# Altium PCB ver_5.PcbDoc
Units mil, origin at the board's own origin, x right, y up, seen from the top; angles counter-clockwise.
Board outline 2874.65 x 4650.67 mil, 2 copper layers (Top Layer, Bottom Layer); 64 components, 49 nets, 262 pads, 15 vias.
Unrouted connection lines stored in the file: 131.
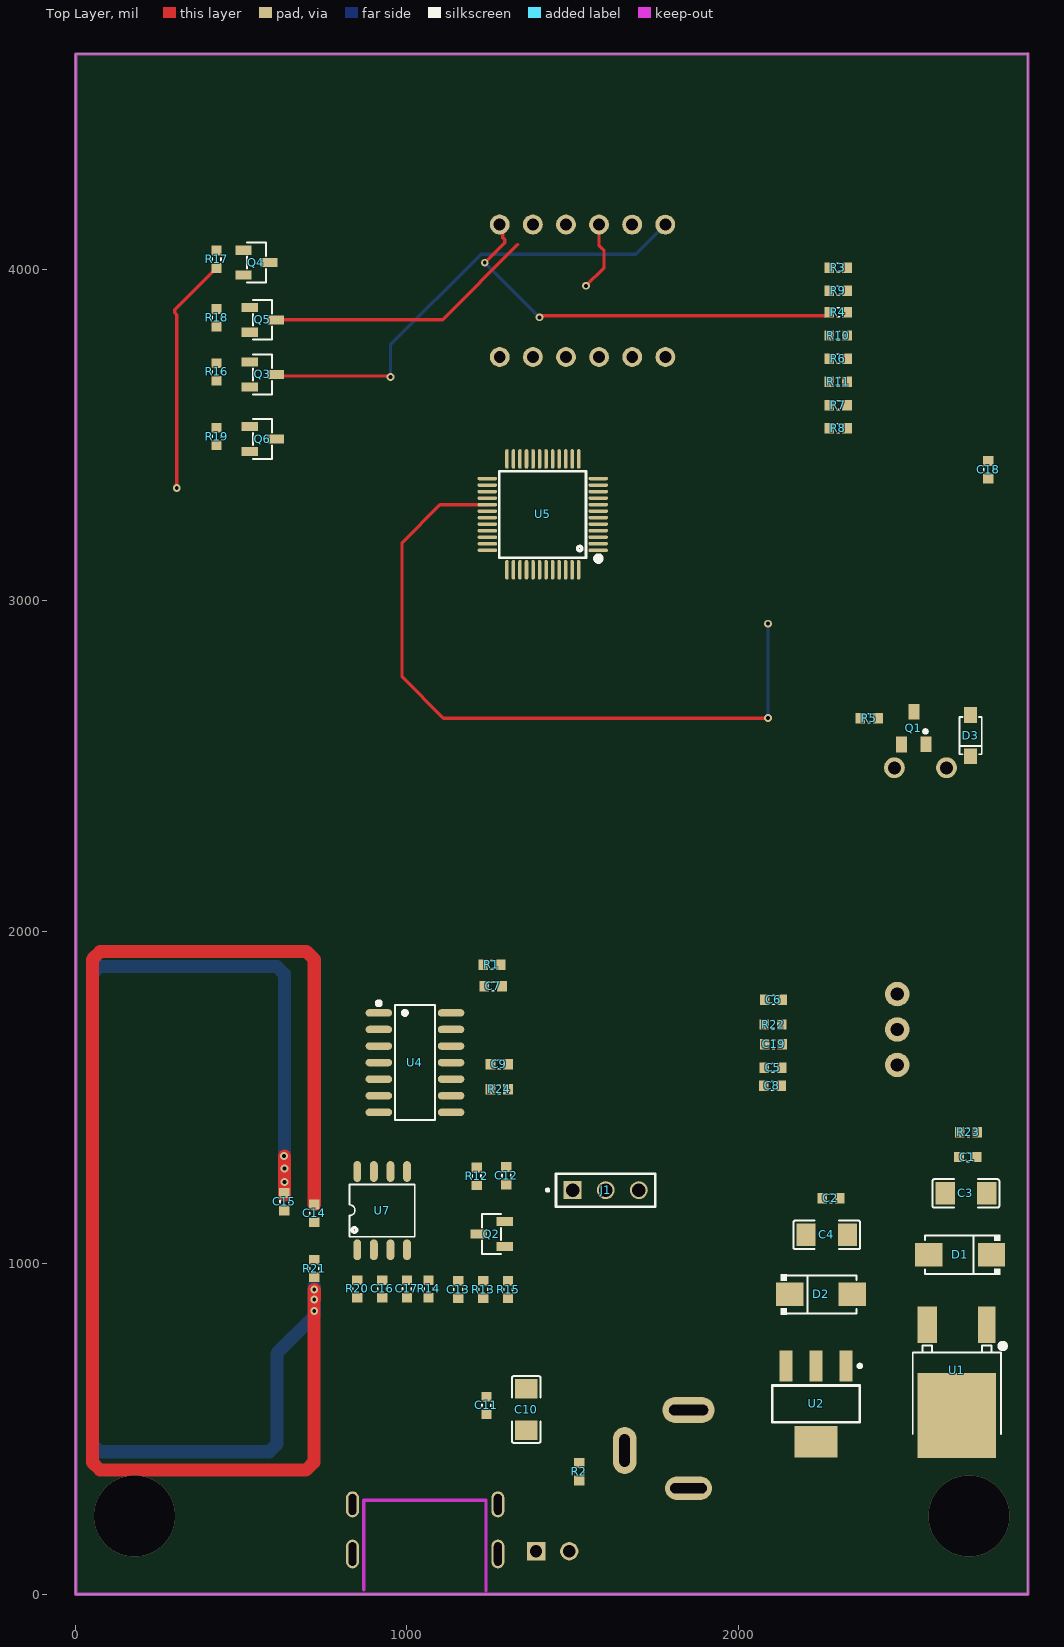
[diagram p0: Top Layer view]
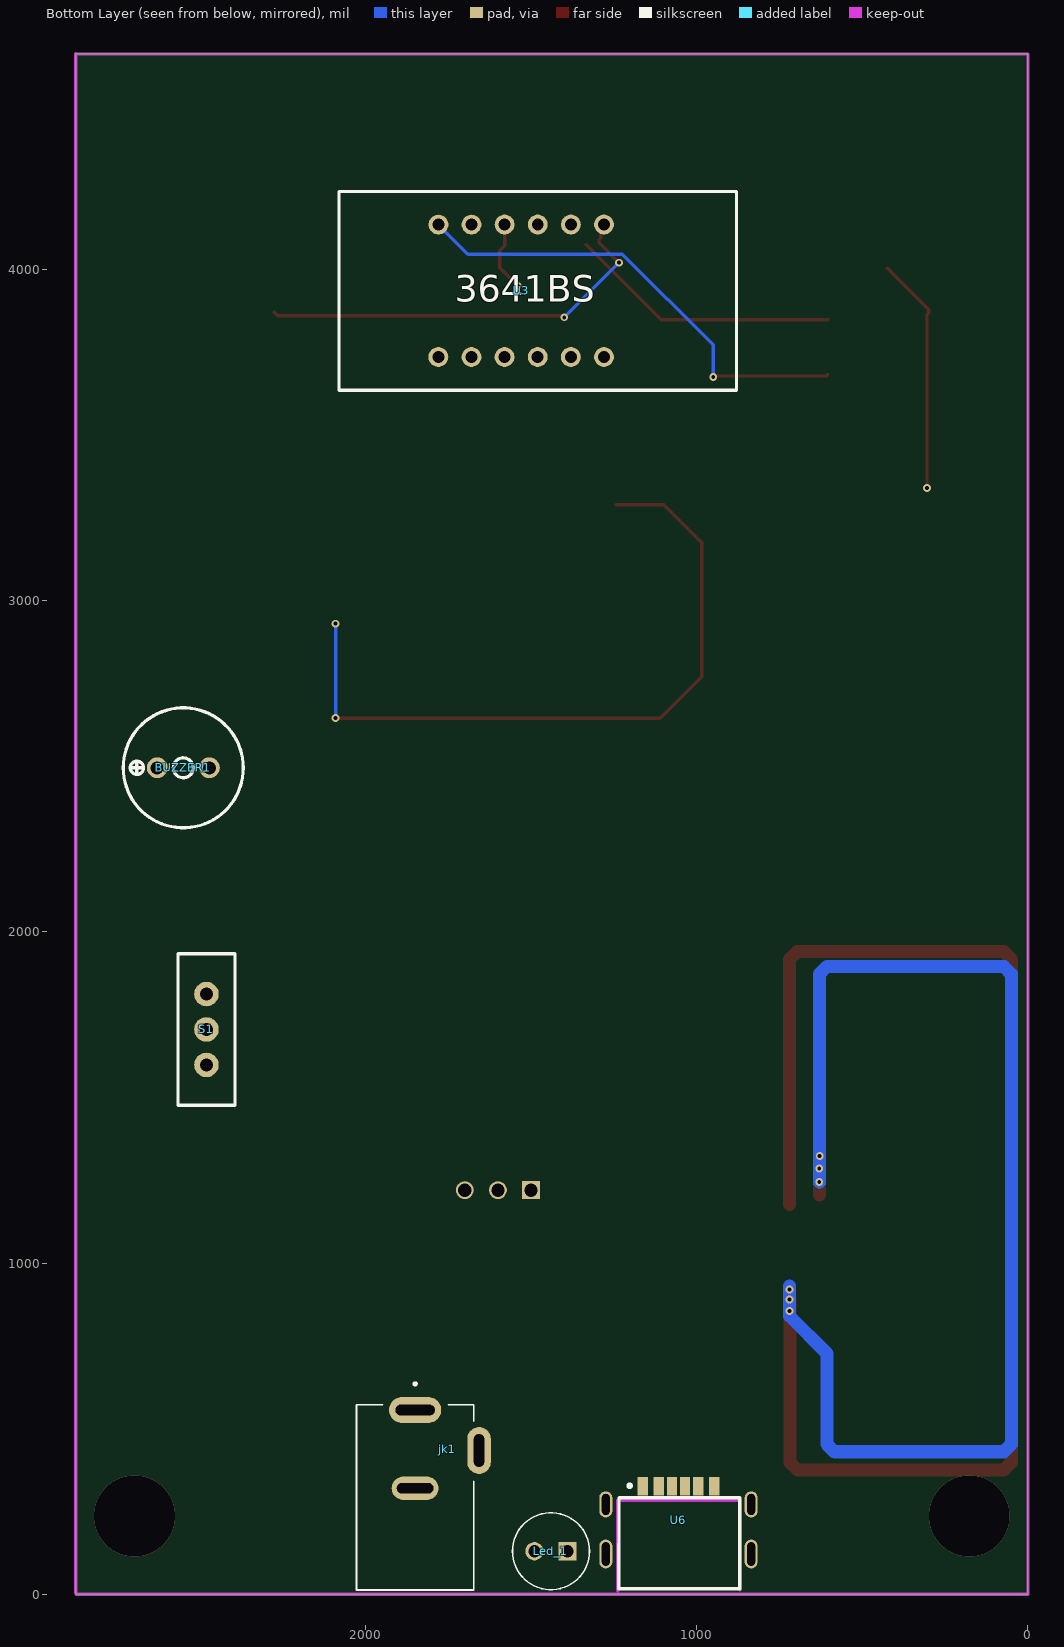
[diagram p1: Bottom Layer view, seen from below]

## Layer stack, top to bottom
Top Solder: solder mask 0.4, Solder Resist, Dk 3.5
Top Layer: signal copper 1.4
Dielectric 1: dielectric 12.6, FR-4, Dk 4.8
Bottom Layer: signal copper 1.4
Bottom Solder: solder mask 0.4, Solder Resist, Dk 3.5

## Board outline
0,0 2874.02,0 2874.65,5 2874.65,4650.67 2874.02,4649.96 0,4650

## Design rules (kind name [scope] priority, off if disabled: settings)
Clearance [All] p1: gap=9 ignorepadtopadclearanceinfootprint=FALSE
PolygonConnect [All] p1: connectstyle=Relief reliefconductorwidth=10 reliefentries=4 polygonreliefangle="90 Angle" airgapwidth=10
RoutingVias [All] p1: holewidth=10 width=20 viastyle="Through Hole" minholewidth=5 minwidth=10 maxholewidth=20 maxwidth=30
SolderMaskExpansion [All] p1: expansion=4 istentingtop=FALSE
Width [All] p1: maxlimit=10 minlimit=10 preferedwidth=10
30 further rules are at their usual default settings.

## Classes and differential pairs
component class ver_3: C3 C5 C6 C7 C8 C9 D2 J1 Led_1 Q Q1 Q2 Q3 Q5 Q6 R1 R2 R5 R12 R13 R14 R15 R16 R17 R18 R19 R20 R21 R22 U1 U2 U4 U7

## Components (designator, comment, footprint, x,y, rotation, side; value= is the part's Value field where it differs from the comment)
BUZZER1 "buzzer_9x5.5" buzzer_9x5.5 2550,2495 r90 bottom
C1 "0.1uF" CN-SMD-0603 2693.43,1320 r0 top
C2 "0.1uF" CN-SMD-0603 2280,1195 r0 top
C3 "22uF" cap_1206 2687.3,1210 r0 top
C4 "22uF" cap_1206 2267.3,1085 r0 top
C5 "104" CN-SMD-0603 2105,1590 r0 top
C6 "104" CN-SMD-0603 2106.57,1795 r0 top
C7 "104" CN-SMD-0603 1260,1835 r0 top
C8 "104" CN-SMD-0603 2103.43,1535 r0 top
C9 "104" CN-SMD-0603 1278.43,1600 r0 top
C10 "22uF" cap_1206 1360,557.7 r90 top
C11 "0.1uF" CN-SMD-0603 1240,570 r90 top
C12 "104" CN-SMD-0603 1300,1263.42 r270 top
C13 "150pF" CN-SMD-0603 1155,920 r270 top
C14 "100pF" CN-SMD-0603 720,1149.76 r90 top
C15 "1nF" CN-SMD-0603 630,1185 r90 top
C16 "104" CN-SMD-0603 925,921.57 r270 top
C17 "104" CN-SMD-0603 1000,921.57 r270 top
C18 "1nF" CN-SMD-0603 2755,3395 r270 top
C19 "104" CN-SMD-0603 2106.57,1660 r0 top
D1 "diode_1N4007(M7)" diode_1N4007-M7 2670,1025 r180 top
D2 "diode_1N4007(M7)" diode_1N4007-M7 2250,905 r0 top
D3 "1N4148" SOD-123 2700,2590 r270 top value=1N4007
J1 "JP3x1" JP3x1 1425,1220 r0 top
jk1 "jack dc" "jack dc" 1850,556.22 r270 bottom
Led_1 "led_5mm" led_5mm 1440,130 r0 bottom
Q1 "AO3400" SOT23B 2530,2615 r0 top value=C1815
Q2 "J3Y" j3y -15696.99,17684.6 r0 top
Q3 "2TY" 2TY 17516.99,-12914.6 r180 top
Q4 "2TY" 2TY 17498.25,-12577 r180 top
Q5 "2TY" 2TY 17516.99,-12749.6 r180 top
Q6 "2TY" 2TY 17516.99,-13109.6 r180 top
R1 "10K" RES-SMD-0603 1256.57,1900 r0 top value="R1/4W - 1K"
R2 "1K" RES-SMD-0603 1520,370 r90 top value="R1/4W - 1K"
R3 "330" RES-SMD-0603 2301.57,4005 r180 top value="R1/4W - 1K"
R4 "330" RES-SMD-0603 2301.57,3870 r180 top value="R1/4W - 1K"
R5 "1K" RES-SMD-0603 2395,2645 r0 top value="R1/4W - 1K"
R6 "330" RES-SMD-0603 2301.57,3730 r180 top value="R1/4W - 1K"
R7 "330" RES-SMD-0603 2301.57,3590 r180 top value="R1/4W - 1K"
R8 "330" RES-SMD-0603 2301.57,3520 r180 top value="R1/4W - 1K"
R9 "330" RES-SMD-0603 2301.57,3935 r180 top value="R1/4W - 1K"
R10 "330" RES-SMD-0603 2301.57,3800 r180 top value="R1/4W - 1K"
R11 "330" RES-SMD-0603 2301.57,3660 r180 top value="R1/4W - 1K"
R12 "2.2K" RES-SMD-0603 1210,1261.57 r270 top value="R1/4W - 1K"
R13 "6.8K" RES-SMD-0603 1230,920 r90 top value="R1/4W - 1K"
R14 "1K" RES-SMD-0603 1065,921.57 r270 top value="R1/4W - 1K"
R15 "2.2K" RES-SMD-0603 1305,920 r270 top value="R1/4W - 1K"
R16 "330" RES-SMD-0603 425,3690 r270 top value="R1/4W - 1K"
R17 "330" RES-SMD-0603 425,4030 r270 top value="R1/4W - 1K"
R18 "330" RES-SMD-0603 425,3853.43 r270 top value="R1/4W - 1K"
R19 "330" RES-SMD-0603 425,3495 r270 top value="R1/4W - 1K"
R20 "47K" RES-SMD-0603 850,921.57 r90 top value="R1/4W - 1K"
R21 "1K5" RES-SMD-0603 720,983.43 r90 top value="R1/4W - 1K"
R22 "4.7K" RES-SMD-0603 2105,1720 r0 top value="R1/4W - 1K"
R23 "1K" RES-SMD-0603 2695,1395 r0 top value="R1/4W - 1K"
R24 "47K" RES-SMD-0603 1278.42,1525 r0 top value="R1/4W - 1K"
S1 "nut_gat_3P" nut_gat_3p 2480,1705 r0 bottom
U1 "78M05" 78M05 2665,640 r270 top
U2 "AMS1117" AMS1117-SOT223 2235,575 r270 top
U3 "3641AS" 3641BS 1480,3935 r180 bottom
U4 "SN74HC14DRG4" 74HC14 1024.02,1609.37 r270 top
U5 "STM32F103C8T6" LQFP-48_L7.0-W7.0-P0.50-LS9.0-BL 1410,3260 r90 top
U6 "USB-TYPE-C-6-PIN-CONG" USB-TYPE-C-6-PIN-CONG 1055,180 r180 bottom
U7 "MC12079" MC12079 925,1158.11 r0 top

## Footprints (in the part's own frame and the unit in brackets; to place one, negate y for a bottom-side part, rotate by r counter-clockwise, add the part's x,y. Pads: shape width x height; smd on the part's side, far side on the other; paste and mask are expansions set on the pad)
2TY [mm]
  rect 1.25x0.7 smd paste+0 mask+0.051: 1(431.596,-422.514) 2(431.596,-420.614) 3(429.597,-421.564)
  silkscreen extent 429.87,-423.09 431.32,-420.04
74HC14 [mil]
  oval 22.6x80.24 smd paste+0 mask+2: 1(-145.63,-109.02) 2(-95.63,-109.02) 3(-45.63,-109.02) 4(4.37,-109.02) 5(54.37,-109.02) 6(104.37,-109.02) 7(154.37,-109.02) 8(154.37,109.02) 9(104.37,109.02) 10(54.37,109.02) 11(4.37,109.02) 12(-45.63,109.02) 13(-95.63,109.02) 14(-145.63,109.02)
  silkscreen extent -181,-115 178,60
78M05 [mm]
  rect 2.8x1.35 smd paste+0 mask+0.051: 1(-4.4,2.174)
  rect 2.8x1.5 smd paste+0 mask+0.051: 3(-4.4,-2.406)
  rect 6.5x6 smd paste+0 mask+0.051: 4(2.55,-0.134)
  silkscreen extent -2.98,-3.51 3.98,3.59
3641BS [mil]
  round 60 hole 36 paste+0 mask+2: 1(-300,-200) 2(-200,-200) 3(-100,-200) 4(0,-200) 5(100,-200) 6(200,-200) 7(200.1,199.9) 8(100.1,199.9) 9(0.1,199.9) 10(-99.9,199.9) 11(-199.8,199.8) 12(-299.8,199.8)
  silkscreen extent -600,-300 600,300
AMS1117-SOT223 [mm]
  rect 2.4x1 smd: 1(-2.9,2.3) 2(-2.9,0) 3(-2.9,-2.3)
  rect 2.4x3.3 smd: 2(2.9,0)
  silkscreen extent -3.02,-3.35 1.4,3.48, body extent -3.39,-3.27 3.5,3.23, height 1.72
buzzer_9x5.5 [mm]
  round 1.6 hole 1 paste+0 mask+0.051: 1(0,1.999) 2(0,-1.999)
  silkscreen extent -4.6,-4.6 4.6,4.6
cap_1206 [mm]
  rect 1.485x1.728 smd paste-100 mask+0.051: 1(-1.593,0) 2(1.593,0)
  silkscreen extent -2.56,-1.09 2.56,1.09
CN-SMD-0603 [mm]
  round 0.254 on Mech15: 0(0,0)
  rect 0.75x0.8 smd: 1(-0.675,0) 2(0.675,0)
  silkscreen extent -0.1,-0.34 0.1,0.34, body extent -0.8,-0.43 0.8,0.43, height 0.8
diode_1N4007-M7 [mm]
  rect 2.1x1.8 smd paste+0 mask+0.051: 1(-2.4,0) 2(2.4,0)
  silkscreen extent -3.08,-1.54 2.7,1.54
j3y [mm]
  rect 1.25x0.7 smd paste+0 mask+0.051: 1(431.596,-422.514) 2(431.596,-420.614) 3(429.597,-421.564)
  silkscreen extent 429.87,-423.09 431.32,-420.04
"jack dc" [mm]
  oval 2x4 hole 0.8 slot 3 at 90 deg: 1(0,0)
  oval 1.8x3.6 hole 0.8 slot 2.8 at 90 deg: 2(6,0)
  oval 3.6x1.8 hole 0.8 slot 2.5 at 0 deg: 3(3.1,4.9)
  silkscreen extent -2.1,-4.5 13.8,4.5
JP3x1 [mm]
  rect 1.37x1.37 hole 1.02: 01(1.905,0)
  round 1.37 hole 1.02: 02(4.445,0) 03(6.985,0)
  silkscreen extent -0.11,-1.27 8.25,1.27
led_5mm [mm]
  round 1.4 hole 0.93: A(1.27,0)
  rect 1.4x1.4 / inner round 1.4 / far side rect 1.4x1.4 hole 0.93: C(-1.27,0)
  silkscreen extent -2.95,-2.95 2.95,2.95, body extent -2.5,-2.95 2.95,2.95, height 9.6
LQFP-48_L7.0-W7.0-P0.50-LS9.0-BL [mm]
  oval 0.27x1.5 smd paste+0 mask+0.05: 1(-2.75,-4.25) 2(-2.25,-4.25) 3(-1.75,-4.25) 4(-1.25,-4.25) 5(-0.75,-4.25) 6(-0.25,-4.25) 7(0.25,-4.25) 8(0.75,-4.25) 9(1.25,-4.25) 10(1.75,-4.25) 11(2.25,-4.25) 12(2.75,-4.25) 25(2.75,4.25) 26(2.25,4.25) 27(1.75,4.25) 28(1.25,4.25) 29(0.75,4.25) 30(0.25,4.25) 31(-0.25,4.25) 32(-0.75,4.25) 33(-1.25,4.25) 34(-1.75,4.25) 35(-2.25,4.25) 36(-2.75,4.25)
  oval 1.5x0.27 smd paste+0 mask+0.05: 13(4.25,-2.75) 14(4.25,-2.25) 15(4.25,-1.75) 16(4.25,-1.25) 17(4.25,-0.75) 18(4.25,-0.25) 19(4.25,0.25) 20(4.25,0.75) 21(4.25,1.25) 22(4.25,1.75) 23(4.25,2.25) 24(4.25,2.75) 37(-4.25,2.75) 38(-4.25,2.25) 39(-4.25,1.75) 40(-4.25,1.25) 41(-4.25,0.75) 42(-4.25,0.25) 43(-4.25,-0.25) 44(-4.25,-0.75) 45(-4.25,-1.25) 46(-4.25,-1.75) 47(-4.25,-2.25) 48(-4.25,-2.75)
  silkscreen extent -3.59,-4.46 3.3,3.34, body extent -4.5,-4.5 4.5,4.5, height 1.5
MC12079 [mm]
  oval 0.6x1.6 smd paste+0 mask+0.051: 1(-1.905,-3) 2(-0.635,-3) 3(0.635,-3) 4(1.905,-3) 5(1.905,3) 6(0.635,3) 7(-0.635,3) 8(-1.905,3)
  silkscreen extent -2.5,-2 2.5,2
nut_gat_3p [mil]
  round 74 hole 40 paste+0 mask+2: 1(0,107) 2(0,0) 3(0,-107)
  silkscreen extent -86,-229 86,229
RES-SMD-0603 [mm]
  round 0.254 on Mech15: 0(0,0)
  rect 0.75x0.8 smd: 1(-0.675,0) 2(0.675,0)
  silkscreen extent -0.1,-0.34 0.1,0.34, body extent -0.8,-0.4 0.8,0.4, height 0.43
SOD-123 [mm]
  rect 1.2x1 smd: 1(-1.635,0.04) 2(1.515,0.04)
  silkscreen extent -1.48,-0.81 1.37,0.89, body extent -1.98,-0.81 1.87,0.89, height 1.43
SOT23B [mm]
  rect 0.85x1.2 smd: 1(0.946,-1.255) 2(0.006,1.24) 3(-0.944,-1.26)
  silkscreen extent 0.77,-0.39 1.02,-0.14, body extent -1.49,-1.31 1.51,1.19, height 1.06
USB-TYPE-C-6-PIN-CONG [mm]
  oval 1x2.2 hole 0.6 slot 1.8 at 90 deg paste+0 mask+0.051: 7(-5.575,-1.482) 8(5.575,-1.482)
  oval 1x2 hole 0.6 slot 1.6 at 90 deg paste+0 mask+0.051: 7(-5.575,2.318) 8(5.575,2.318)
  rect 0.8x1.4 smd paste-100 mask+0.051: A5(-0.5,3.718) A9(1.52,3.718) A12(2.75,3.718) B5(0.5,3.718) B9(-1.52,3.718) B12(-2.75,3.718)
  Keep-Out Layer lines w0.254: 4.715,-4.251 4.715,2.649 -4.455,2.649 -4.66,2.649 -4.66,-4.291
  silkscreen extent -4.58,-4.14 4.69,3.88

## Part data
C1 C2 C11: library part "CAP 104"
C3 C4 C10: library part cap_1206
C5 C6 C7 C8 C9 C12 C13 C14 C15 C16 C17 C18 C19: library part "Tu 0805_1", "Tu 0805", Bottom=10, Right=20
D3: library part D1A, "Diode 1A"
Q1: library part C1815, "NPN 600mW, ECB"
Q2: library part S8050/J3Y/0.4
R1 R12 R13 R14 R15 R20 R21 R22 R23 R24: library part "Tro 0805_1", "Tro 0805"
R2 R3 R4 R5 R6 R7 R8 R9 R10 R11 R16 R17 R18 R19: library part Res, "Resistor 1/4W"
U5: library part APM32F030C8T6

## Via types
v1: diameter 23.62, hole 11.81, Top Layer to Bottom Layer, 13 vias
v2: diameter 244.09, hole 244.09, Top Layer to Bottom Layer, 2 vias

## Nets (pads, with @x,y where several pads share a name; then routed paths per layer and width w, separated by ;. In a path a pad name is that pad's centre, name@x,y a point inside that pad or via, vN(x,y) a via of type N, cw(c..) or ccw(c..) an arc to the next point about the centre after c; other vN are vias at no path point)
3V3: C5.1 C6.1 C7.2 C8.1 C9.2 C10.2 C11.2 C19.1 D2.2 Q3.2 Q5.2 Q6.2 R22.2 R23.1 U2.2 U5.1 U5.9 U5.24 U5.36 U5.48
4A: Q2.3 R12.2 R13.2 U4.9
4Y: U4.8 U4.11
5V: BUZZER1.1 C2.2 C4.2 C12.2 C16.2 C17.2 D1.2 D2.1 D3.2 R2.2 R12.1 R20.1 U1.3 U2.3 U4.14 U6.A9 U6.B9 U7.2
9V: C1.2 C3.2 D1.1 jk1.1 U1.1
A: R3.2 U3.11
B: R4.2 U3.7 | length 1260.8
  Top Layer w10: v1(1234.9,4019.9) 1294.9,4079.9 1294.9,4089.9 1289.47,4095.33 1289.47,4125.33 U3.7 ; v1(1399.8,3855) 1403.49,3855 1408.49,3860 2265.24,3860 2275,3869.76 R4.2
  Bottom Layer w10: v1(1234.9,4019.9) v1(1399.8,3855)
BOOT0: R24.2 U5.44
buzzer: R5.1 U5.29 | length 2151.9
  Top Layer w10: U5.29 1099.53,3289.53 985,3175 985,2770 1110,2645 v1(2090,2645)
  Bottom Layer w10: v1(2090,2645) v1(2090,2930)
C: R6.2 U3.4
D: R7.2 U3.2
DIG1: Q3.3 U3.12 | length 1426.1
  Top Layer w10: Q3.3 608.53,3677.61 947.39,3677.61 v1(950,3675)
  Bottom Layer w10: v1(950,3675) 950,3771.5 1224.21,4045.71 1690.71,4045.71 U3.12
DIG2: U3.9
DIG3: Q5.3 U3.8 | length 825.4
  Top Layer w10: Q5.3 1107.4,3847.4 1334.9,4074.9
DIG4: Q6.3 U3.6
DP: R11.2 U3.3
E: R8.2 U3.1
F: R9.2 U3.10 | length 213.9
  Top Layer w10: v1(1540,3950) 1594.9,4004.9 1594.9,4055.64 1579.9,4070.64 U3.10
G: R10.2 U3.5
GND: C1.1 C2.1 C3.1 C4.1 C5.2 C6.2 C7.1 C8.2 C9.1 C10.1 C11.1 C12.1 C16.1 C17.1 C19.2 J1.02 jk1.2 jk1.3 Led_1.C Q1.1 Q2.2 R1.1 R14.2 R15.2 R24.1 S1.3 U1.4 U2.1 U4.7 U5.8 U5.23 U5.35 U5.47 U6.A12 U6.B12 U7.3 U7.5 U7.6
NetBUZZER1_2: BUZZER1.2 D3.1 Q1.2
NetC13_1: C13.1 Q2.1 R13.1 R15.1
NetC14_1: C14.1 C15.1 R21.2 U7.8
NetC14_2: C14.2 C15.2 R20.2 R21.1 U7.1
Netled_1_A: Led_1.A R2.1
NetQ1_3: Q1.3 R5.2
NetQ3_1: Q3.1 R16.1
NetQ4_1: R17.1
NetQ5_1: Q5.1 R18.1
NetQ6_1: Q6.1 R19.1
NRST: R22.1 U5.7
OUT: C13.2 R14.1 U7.4
PA0: R3.1 U5.10
PA1: R9.1 U5.11
PA2: R4.1 U5.12
PA3: R10.1 U5.13
PA4: R6.1 U5.14
PA5: R11.1 U5.15
PA6: R7.1 U5.16
PA7: R8.1 U5.17
PB0: R17.2 U5.28 | length 718.6
  Top Layer w10: v1(305,3340) 305,3863.43 299.14,3869.28 299.14,3877.57 414.25,3992.68 414.25,3993.66 424.02,4003.43 R17.2
PB1: U4.10 U5.19
PB2: R1.2 U5.20
PC13: R19.2 U5.25
PC14: R16.2 U5.26
PC15: R18.2 U5.27
SW: R23.2 S1.2 U5.39
SWCLK: J1.01 U5.37
SWDIO: J1.03 U5.34
pads on no net: C1.0 C2.0 C5.0 C6.0 C7.0 C8.0 C9.0 C11.0 C12.0 C13.0 C14.0 C15.0 C16.0 C17.0 C18.0 C18.1 C18.2 C19.0 Q4.1 Q4.2 Q4.3 R1.0 R2.0 R3.0 R4.0 R5.0 R6.0 R7.0 R8.0 R9.0 R10.0 R11.0 R12.0 R13.0 R14.0 R15.0 R16.0 R17.0 R18.0 R19.0 R20.0 R21.0 R22.0 R23.0 R24.0 S1.1 U4.1 U4.2 U4.3 U4.4 U4.5 U4.6 U4.12 U4.13 U5.2 U5.3 U5.4 U5.5 U5.6 U5.18 U5.21 U5.22 U5.30 U5.31 U5.32 U5.33 U5.38 U5.40 U5.41 U5.42 U5.43 U5.45 U5.46 U6.7 U6.8 U6.A5 U6.B5 U7.7
copper on no net: | length 8022
  Top Layer w39.37: 630,1205 v1(630,1245) v1(630,1285) v1@630,1323.54 ; v1@718.85,890 718.85,855 718.85,398.06 695.79,375 73.06,375 50,398.06 50,1870 50,1916.94 73.06,1940 696.94,1940 720,1916.94 720,1879.38 720,1176.34 ; v1(720,890) v1(720,920)
  Bottom Layer w39.37: v1(630,1245) 630,1872.12 606.94,1895.18 73.06,1895.18 50,1872.12 50,453.25 73.06,430.18 584.27,430.18 607.34,453.25 607.34,727.34 720,840 v1@720,930
  other v1: 720,855 628.74,1323.54
  other v2: 177.17,236.22 2696.85,236.22

## Keep-outs
Keep-Out Layer:
  lines w10: 0,4645.67 0,0 2874.02,0 ; 0,4650 2874.02,4649.96 ; 2874.65,5 2874.65,4650.67

## Text inside footprints (layer, text, board x,y; h text height)
U3: Bottom Overlay "3641BS" at 1729.9,3901.3 h80